# Altium PCB breadboardPlugin.PcbDoc
Units mil, origin at the board's own origin, x right, y up, seen from the top; angles counter-clockwise.
Board outline 2047.24 x 984.25 mil, 2 copper layers (Top Layer, Bottom Layer); 58 components, 28 nets, 160 pads, 69 vias.
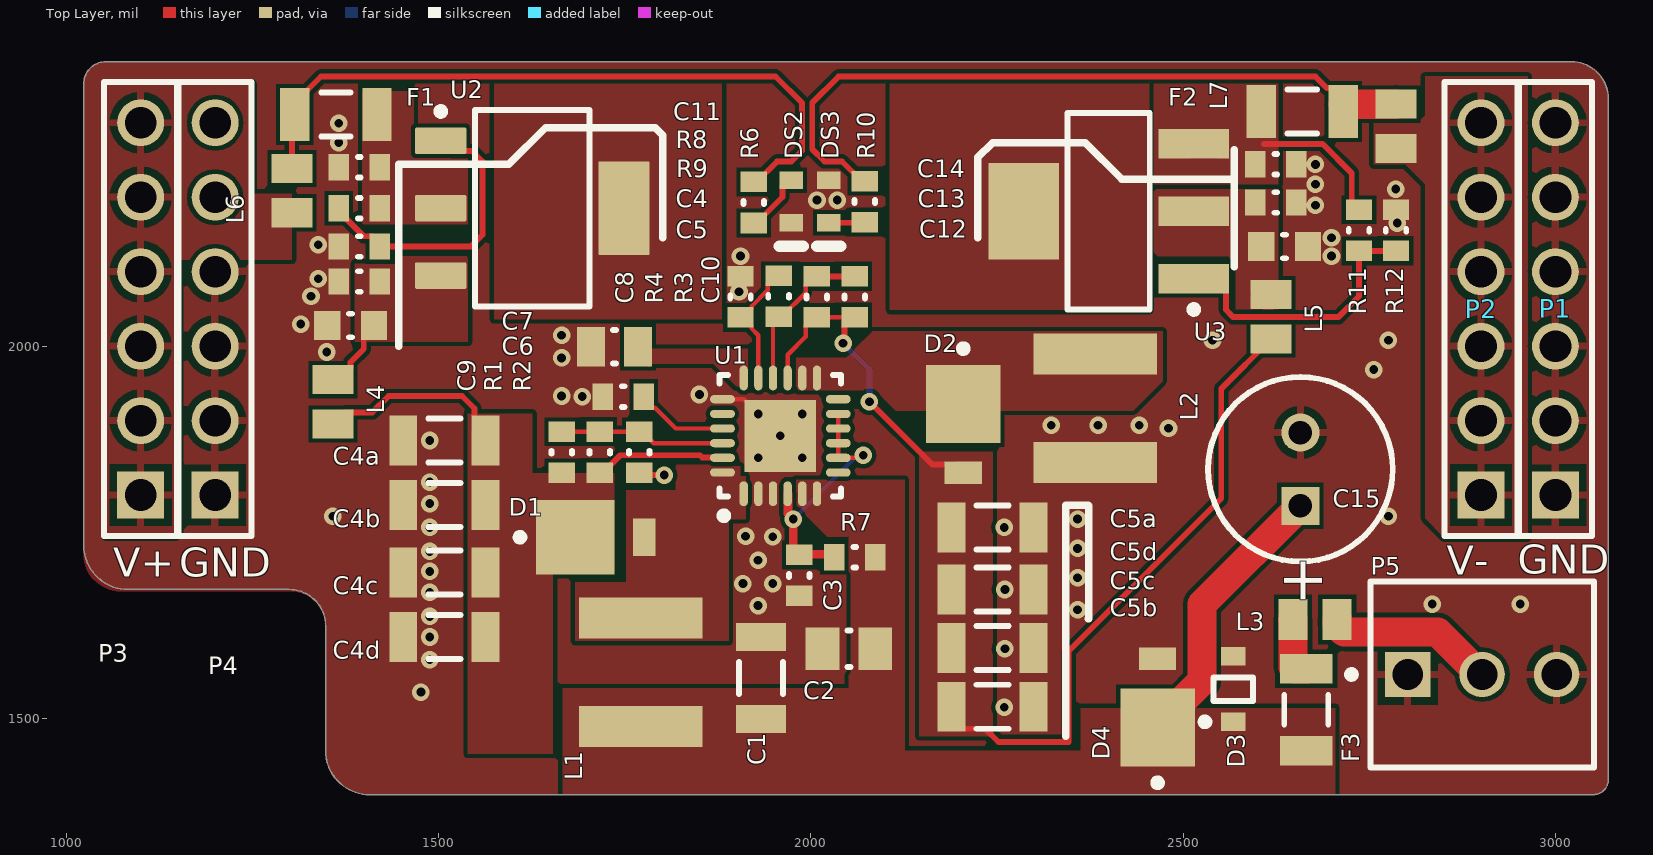
[diagram p0: Top Layer view]
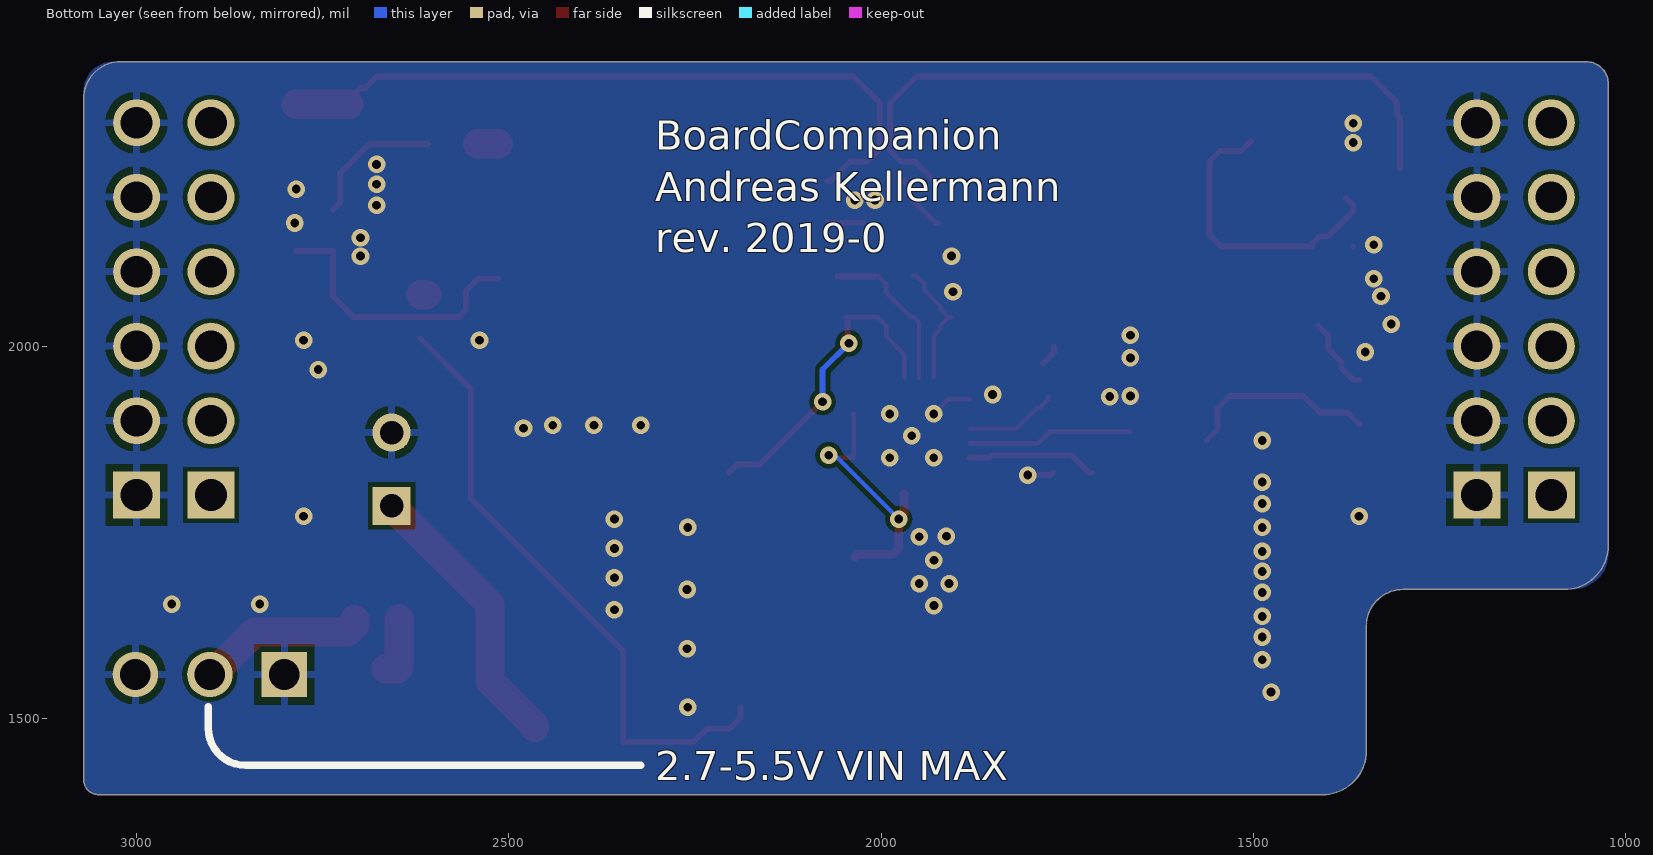
[diagram p1: Bottom Layer view, seen from below]

## Layer stack, top to bottom
Top Solder: solder mask 0.4, Solder Resist, Dk 3.5
Top Layer: signal copper 1.4
Dielectric 1: dielectric 12.6, FR-4, Dk 4.8
Bottom Layer: signal copper 1.4
Bottom Solder: solder mask 0.4, Solder Resist, Dk 3.5

## Board outline
1023.62,1732.28 ccw(c1082.68,1732.28) 1082.68,1673.23 1299.21,1673.23 cw(c1299.21,1624.02) 1348.43,1624.02 1348.43,1456.69 ccw(c1407.48,1456.69) 1407.48,1397.64 3051.18,1397.64 ccw(c3051.18,1417.32) 3070.87,1417.32 3070.87,2332.68 ccw(c3021.65,2332.68) 3021.65,2381.89 1053.15,2381.89 ccw(c1053.15,2352.36) 1023.62,2352.36

## Design rules (kind name [scope] priority, off if disabled: settings)
Clearance [All] p1: gap=5.91 ignorepadtopadclearanceinfootprint=FALSE
PolygonConnect [All] p1: thpad.connectstyle=Relief thpad.reliefconductorwidth=10 thpad.reliefentries=4 thpad.polygonreliefangle="90 Angle" thpad.airgapwidth=10 smdpad.connectstyle=Direct smdpad.reliefconductorwidth=10 smdpad.reliefentries=4 smdpad.polygonreliefangle="90 Angle" smdpad.airgapwidth=10 via.connectstyle=Direct via.reliefconductorwidth=10 via.reliefentries=4 via.polygonreliefangle="90 Angle" via.airgapwidth=10
RoutingVias [All] p1: holewidth=28 width=50 viastyle="Through Hole" minholewidth=11.81 minwidth=23.62 maxholewidth=28 maxwidth=50
SolderMaskExpansion [All] p1: expansion=4
Width [All] p1: maxlimit=196.85 minlimit=5.91 preferedwidth=11.81
30 further rules are at their usual default settings.

## Components (designator, comment, footprint, x,y, rotation, side; value= is the part's Value field where it differs from the comment)
C1 "4.7uF" CAPC1206(3216)190_L 1933.07,1554.33 r270 top
C2 "4.7uF 0805" CAPC0805(2012)155_N 2051.18,1593.7 r0 top value=4.7uF
C3 "100nF" CAPC0603(1608)100_L 1984.25,1692.13 r90 top
C4 "1uF" CAPC0603(1608)100_L 1393.7,2086.81 r0 top value=100nF
C4a "4.7uF" CAPC1206(3216)190_L 1507.87,1609.45 r0 top
C4b "4.7uF" CAPC1206(3216)190_L 1507.87,1873.23 r0 top
C4c "4.7uF" CAPC1206(3216)190_L 1507.87,1786.61 r0 top
C4d "4.7uF" CAPC1206(3216)190_L 1507.87,1696.06 r0 top
C5 "100nF" CAPC0603(1608)100_N 1381.89,2027.76 r0 top
C5a "4.7uF" CAPC1206(3216)190_L 2244.09,1756.52 r180 top
C5b "4.7uF" CAPC1206(3216)190_L 2244.09,1673.23 r180 top
C5c "4.7uF" CAPC1206(3216)190_L 2244.09,1594.49 r180 top
C5d "4.7uF" CAPC1206(3216)190_L 2244.09,1515.75 r180 top
C6 "10nF" CAPC0603(1608)100_L 1748.03,1932.28 r0 top value=100nF
C7 "4.7nF C0G" CAPC0805(2012)75_L 1736.22,1999.21 r0 top value=4.7nF
C8 "220nF" CAPC0603(1608)100_L 1905.51,2066.14 r270 top
C9 "220nF" CAPC0603(1608)100_L 1665.35,1857.48 r270 top
C10 "220nF" CAPC0603(1608)100_L 2059.06,2066.14 r270 top
C11 "1uF" CAPC0603(1608)100_L 1393.7,2240.35 r0 top value=100nF
C12 "100nF" CAPC0603(1608)100_N 2636.22,2133.86 r180 top
C13 "1uF" CAPC0603(1608)100_L 2624.41,2192.91 r180 top value=100nF
C14 "1uF" CAPC0603(1608)100_L 2624.41,2244.09 r180 top value=100nF
C15 "ECA-1HM470" PNSC-ECA-1HM470 2657.48,1834.65 r90 top
D1 "MBRM120LT3" ONSC-POWERMITE-2-457-04_D_V 1736.22,1743.31 r0 top
D2 "MBRM120LT3" ONSC-POWERMITE-2-457-04_D_V 2204.72,1869.85 r270 top
D3 "Q2" ONSC-SOD-323-2-477-02_V 2567.32,1539.37 r90 top
D4 "MBRM120LT3" ONSC-POWERMITE-2-457-04_D_V 2465.69,1540.35 r90 top
DS2 "TLMS1100-GS08" VISH-TLMX1100_V 1973.78,2194.17 r270 top
DS3 "TLMS1100-GS08" VISH-TLMX1100_V 2024.02,2194.17 r270 top
F1 "ptc" LFUS-1206L012WR_V 1362.2,2311.22 r180 top
F2 "ptc" LFUS-1206L012WR_V 2659.84,2314.96 r0 top
F3 "ptc" LFUS-1206L012WR_V 2665.35,1511.81 r270 top
L1 "74404054047" "WE-LQS 5040" 1771.65,1562.2 r90 top
L2 "74404054047" "WE-LQS 5040" 2381.89,1916.54 r90 top
L3 "FBMJ2125HM210NT" INDC2013X105X50LL20T30 2677.17,1632.87 r180 top
L4 "FBMJ2125HM210NT" INDC2013X105X50LL20T30 1358.27,1925.2 r270 top
L5 "FBMJ2125HM210NT" INDC2013X105X50LL20T30 2618.11,2039.37 r270 top
L6 "FBMJ2125HM210NT" INDC2013X105X50LL20T30 1303.15,2208.86 r90 top
L7 "FBMJ2125HM210NT" INDC2013X105X50LL20T30 2785.83,2295.28 r90 top
P1 "PHT-106-01-L-S" SMTC-PHT-106-01-X-S 3000,1800 r90 top
P2 "PHT-106-01-L-S" SMTC-PHT-106-01-X-S 2900,1800 r90 top
P3 "PHT-106-01-L-S" SMTC-PHT-106-01-X-S 1100,1800 r90 top
P4 "PHT-106-01-L-S" SMTC-PHT-106-01-X-S 1200,1800 r90 top
P5 "22-23-2031" MOLX-22-23-2031_V 2901.57,1559.06 r0 top
R1 "tbd" RESC0603(1608)_L 1716.54,1857.48 r90 top value="100.00 Ohm"
R2 "tbd" RESC0603(1608)_L 1769.69,1857.48 r270 top value="100.00 Ohm"
R3 "tbd" RESC0603(1608)_L 2007.87,2066.14 r270 top value="100.00 Ohm"
R4 "tbd" RESC0603(1608)_L 1956.69,2066.93 r270 top value="100.00 Ohm"
R6 "330" RESC0603(1608)_L 1923.23,2192.91 r270 top value="100.00 Ohm"
R7 "100R" RESC0603(1608)_L 2059.06,1716.54 r0 top value="100.00 Ohm"
R8 "tbd" RESC0603(1608)_L 1393.7,2185.24 r180 top value="100.00 Ohm"
R9 "tbd" RESC0603(1608)_L 1393.7,2133.86 r180 top value="100.00 Ohm"
R10 "330" RESC0603(1608)_L 2072.22,2194.17 r270 top value="100.00 Ohm"
R11 "tbd" RESC0603(1608)_L 2736.22,2155.51 r270 top value="100.00 Ohm"
R12 "tbd" RESC0603(1608)_L 2785.83,2155.51 r90 top value="100.00 Ohm"
U1 "TPS65130RGET" TI-RGE24-2450X2450TP_V 1959.06,1879.53 r90 top locked
U2 "LM317AEMP" DCY0004A_N 1625.98,2185.24 r0 top
U3 "LM337IMPX" MP04A_N 2400,2181.1 r180 top

## Footprints (in the part's own frame and the unit in brackets; to place one, negate y for a bottom-side part, rotate by r counter-clockwise, add the part's x,y. Pads: shape width x height; smd on the part's side, far side on the other; paste and mask are expansions set on the pad)
CAPC0603(1608)100_L [mm] "Chip Capacitor, Body 1.6x0.8mm, Height 1.0mm, IPC High Density"
  rect 0.7x0.9 smd: 1(-0.7,0) 2(0.7,0)
  silkscreen extent -0.05,-0.35 0.05,0.35, body extent -0.87,-0.47 0.88,0.48, height 1
CAPC0603(1608)100_N [mm] "Chip Capacitor, Body 1.6x0.8mm, Height 1.0mm, IPC Medium Density"
  rect 0.9x1 smd: 1(-0.8,0) 2(0.8,0)
  silkscreen extent -0.05,-0.4 0.05,0.4, body extent -0.87,-0.48 0.88,0.47, height 1
CAPC0805(2012)75_L [mm] "Chip Capacitor, Body 2.0x1.2mm, Height 0.75mm, IPC High Density"
  rect 0.95x1.35 smd: 1(-0.8,0) 2(0.8,0)
  silkscreen extent -0.05,-0.58 0.05,0.58, body extent -1.1,-0.72 1.1,0.72, height 0.75
CAPC0805(2012)155_N [mm] "Chip Capacitor, Body 2.0x1.2mm, Height 1.55mm, IPC Medium Density"
  rect 1.15x1.45 smd: 1(-0.9,0) 2(0.9,0)
  silkscreen extent -0.05,-0.62 0.05,0.63, body extent -1.1,-0.72 1.1,0.73, height 1.55
CAPC1206(3216)190_L [mm] "Chip Capacitor, Body 3.2x1.6mm, Height 1.9mm, IPC High Density"
  rect 0.95x1.7 smd: 1(-1.4,0) 2(1.4,0)
  silkscreen extent -0.55,-0.75 0.55,0.75, body extent -1.7,-0.9 1.7,0.9, height 1.9
DCY0004A_N [mm] "SOT223, 4-Leads, Body 6.7x3.7mm, Pitch 2.3mm, IPC Medium Density"
  rrect11% 1.75x0.9 smd: 1(-3.125,2.3) 2(-3.125,0) 3(-3.125,-2.3)
  rrect6% 1.75x3.2 smd: 4(3.125,0)
  silkscreen extent -3.25,-3.35 1.95,3.42, body extent -3.5,-3.25 3.5,3.25, height 1.62
INDC2013X105X50LL20T30 [mm] "Chip Inductor, 2-Leads, Body 2.2x1.45mm, IPC High Density"
  rect 0.99x1.39 smd: 1(-0.755,0) 2(0.755,0)
  body extent -1.1,-0.72 1.1,0.72, height 1.05
LFUS-1206L012WR_V [mm] "SMD, 2-Leads, Body 3.2x1.65mm"
  rect 1x1.8 smd: 1(-1.4,0) 2(1.4,0)
  silkscreen extent -0.5,-0.75 0.5,0.75, body extent -1.6,-0.82 1.6,0.82, height 1.45
MOLX-22-23-2031_V [mm] "CONN, 3-Leads, Body 7.62x6.35mm, Pitch 2.54mm"
  rect 1.55x1.55 hole 1.05: 1(-2.54,0)
  round 1.55 hole 1.05: 2(0,0) 3(2.54,0)
  silkscreen extent -4.58,-3.17 3.81,3.17, body extent -3.73,-3.25 3.73,3.1, height 10.67
MP04A_N [mm] "SOT223, 4-Leads, Body 6.5x3.5mm, Pitch 2.3mm, Lead Span 7mm, IPC Medium Density"
  rect 2.4x1 smd: 1(-2.9,2.3) 2(-2.9,0) 3(-2.9,-2.3)
  rect 2.4x3.3 smd: 4(2.9,0)
  silkscreen extent -3.03,-3.35 1.4,3.47, body extent -1.86,-3.35 1.86,3.35, height 1.8
ONSC-POWERMITE-2-457-04_D_V [mil] "POWERMITE, 2-Leads, Body 1.965x1.9mm"
  rect 105.12x100 smd: 1(-52.56,0)
  rect 30x50 smd: 2(40,0)
  silkscreen extent -132,-5 -122,5, body extent -80,-37 -3,37, height 45
ONSC-SOD-323-2-477-02_V [mm] "SOD, 2-Leads, Body 1.7x1.25mm"
  rect 0.63x0.83 smd: 1(-1.115,0) 2(1.115,0)
  silkscreen extent -1.24,-0.67 0.4,1.09, body extent -0.85,-0.63 0.85,0.63, height 1.06
PNSC-ECA-1HM470 [mm]
  rect 1.3x1.3 hole 0.8: 1(-1.25,0)
  round 1.3 hole 0.8: 2(1.25,0)
  silkscreen extent -3.15,-3.15 3.15,3.15, body extent -3.15,-3.15 3.15,3.15, height 12.2
RESC0603(1608)_L [mm] "Chip Resistor, Body 1.6x0.8mm, IPC High Density"
  rect 0.7x0.9 smd: 1(-0.7,0) 2(0.7,0)
  silkscreen extent -0.05,-0.35 0.05,0.35, body extent -0.85,-0.47 0.85,0.47, height 0.6
SMTC-PHT-106-01-X-S [mm] "Press Fit Socket Assembly, 1x6 Pins, Vertical, 2.54mm Pitch, Male"
  rect 1.6x1.6 hole 1.081: 1(0,0)
  round 1.6 hole 1.081: 2(2.54,0) 3(5.08,0) 4(7.62,0) 5(10.16,0) 6(12.7,0)
  silkscreen extent -1.4,-1.24 14.1,1.24, body extent -1.26,-1.25 13.96,1.25, height 8.38
TI-RGE24-2450X2450TP_V [mm] "QFN, 24-Leads, Body 4x4mm, Pitch 0.5mm, Thermal Pad 2.45x2.45mm"
  oval 0.85x0.28 smd: 1(-1.975,1.25) 2(-1.975,0.75) 3(-1.975,0.25) 4(-1.975,-0.25) 5(-1.975,-0.75) 6(-1.975,-1.25) 13(1.975,-1.25) 14(1.975,-0.75) 15(1.975,-0.25) 16(1.975,0.25) 17(1.975,0.75) 18(1.975,1.25)
  oval 0.28x0.85 smd: 7(-1.25,-1.975) 8(-0.75,-1.975) 9(-0.25,-1.975) 10(0.25,-1.975) 11(0.75,-1.975) 12(1.25,-1.975) 19(1.25,1.975) 20(0.75,1.975) 21(0.25,1.975) 22(-0.25,1.975) 23(-0.75,1.975) 24(-1.25,1.975)
  rect 2.45x2.45 smd: 25(0,0)
  silkscreen extent -2.85,-2.07 2.07,2.07, body extent -2,-2 2,2, height 1
VISH-TLMX1100_V [mm] "SMD, 2-Leads, Body 1.6x0.8mm"
  rect 0.6x0.8 smd: 1(-0.725,0) 2(0.725,0)
  silkscreen extent 1.53,-0.4 1.53,0.4, body extent -0.8,-0.4 0.8,0.4, height 0.65
"WE-LQS 5040" [mm] "SMD Power Inductor, 2-Leads, Body 5.0x5.0mm"
  rect 1.4x4.2 smd: 1(-1.85,0) 2(1.85,0)
  body extent -2.5,-2.5 2.5,2.5, height 3.99

## Part data
C1 C4a C4b C4c C4d C5a C5b C5c C5d: library part CMP-1037-04919-1, "CAP 4.7uF 25V ±20% 1206 (3216 Metric) Thickness 1.9mm SMD", Case-EIA=1206, Case-Metric=3216, Rated Voltage="25 V", Tolerance=±20%, Max Thickness="1.9 mm", Technology=SMT
C2: library part CMP-1036-04882-1, "CAP 4.7uF 10V ±10% 0805 (2012 Metric) Thickness 1.55mm SMD", Case-EIA=0805, Case-Metric=2012, Rated Voltage="10 V", Tolerance=±10%, Max Thickness="1.55 mm", Technology=SMT
C3 C5 C6 C12: library part CMP-1035-02589-1, "CAP 100nF 25V ±20% 0603 (1608 Metric) Thickness 1mm SMD", Case-EIA=0603, Case-Metric=1608, Rated Voltage="25 V", Tolerance=±20%, Max Thickness="1 mm", Technology=SMT
C4 C11 C13 C14: library part CMP-1035-02589-1, "CAP 1uF 25V ±20% 0603 (1608 Metric) Thickness 1mm SMD", Case-EIA=0603, Case-Metric=1608, Rated Voltage="25 V", Tolerance=±20%, Max Thickness="1 mm", Technology=SMT
C7: library part CMP-1036-03595-1, "CAP 4.7nF 50V ±20% 0805 (2012 Metric) Thickness 0.75mm SMD", Case-EIA=0805, Case-Metric=2012, Rated Voltage="50 V", Tolerance=±20%, Max Thickness="0.75 mm", Technology=SMT
C8 C9 C10: library part CMP-1035-02639-1, "CAP 220nF 10V ±5% 0603 (1608 Metric) Thickness 1mm SMD", Case-EIA=0603, Case-Metric=1608, Rated Voltage="10 V", Tolerance=±5%, Max Thickness="1 mm", Technology=SMT
C15: library part CMP-1665-00013-1, "CAP ALUM 47UF 50V 20% RADIAL", ComponentLink1Description=Datasheet, ComponentLink1URL=http://industrial.panasonic.com/cdbs/www-data/pdf/RDF0000/ABA0000C1047.pdf, PackageReference=ECA-1HM470, PartNumber=ECA-1HM470
D1 D2 D4: library part CMP-1055-00282-1, "Schottky Power Rectifier, 2-Pin Powermite, Tape and Reel", Manufacturer="On Semiconductor", ComponentLink1Description="Manufacturer URL", ComponentLink1URL=http://www.onsemi.com/, ComponentLink2Description=Datasheet, ComponentLink2URL=http://www.onsemi.cn/pub_link/Collateral/MBRM120L-D.PDF, ComponentLink3Description="Package Specification", ComponentLink3URL=http://www.onsemi.com/pub_link/Collateral/457-04.PDF, Configuration=Single, DatasheetVersion="Rev. 7", IFSM Max (A)=50, Mounting Technology="Surface Mount", Note1=0, PackageDescription="2-Pin POWERMITE, Body 1.965 x 1.9 mm", PackageReference=POWERMITE-2-457-04, PackageVersion="Rev. F, 05/2013", Packing="Tape and Reel", PartNumber=MBRM120LT3, RoHS=FALSE
D3: library part CMP-1060-00706-1, "MM3Z5V6ST1G, Zener Voltage Regulator, 300 mW, Tight Tolerance Portfolio, 2-Pin SOD-323, Pb-Free, Tape and Reel, MM3Z5V6ST1G", Manufacturer="On Semiconductor", PartNumber=MM3Z5V6ST1G, ComponentLink1Description="Manufacturer URL", ComponentLink1URL=http://www.onsemi.com/, ComponentLink2Description=Datasheet, ComponentLink2URL=http://www.onsemi.cn/pub_link/Collateral/MM3Z2V4ST1-D.PDF, ComponentLink3Description="Package Specification", ComponentLink3URL=http://www.onsemi.com/pub_link/Collateral/477-02.PDF.1, DatasheetVersion="Rev. 21", Mounting Technology="Surface Mount", PackageDescription="2-Pin SOD, Body 1.7 x 1.25 mm", PackageReference=SOD-323-2-477-02, PackageVersion="Rev. H, 03/2007", Packing="Tape and Reel", P Max (W)=0.3, RoHS=Pb-Free
DS2 DS3: library part CMP-1666-00027-1, "LED, RED, 2.1 V, -40 to 100 degC, 2-Pin SMD (0603), RoHS, Tape and Reel", Capacitance="12 pF", Case/Package=0603, Case Code (Metric)=1608, Max Operating Temperature=125degC, Min Operating Temperature=-55degC, Package Quantity=4000, Resistance="100000000000 Ohm", Tolerance=5%, Type (Capacitors)=C0G, Voltage Rating="50 V", Case Code (Imperial)=0603, ComponentLink1Description="Manufacturer URL", ComponentLink1URL=http://www.vishay.com/, ComponentLink2Description=Datasheet, ComponentLink2URL=http://www.vishay.com/docs/83173/tlmb1100.pdf, DatasheetVersion="Rev. 2.7, 03/2016", Height="0.8 mm", Length="1.6 mm", Mount="Surface Mount", PackageDescription="2-Pin Surface Mount Device, Body 1.6 x 0.8 mm", PackageReference=TLMX1100, Packaging="Tape and Reel", Pins=2, Radiation Hardening=No, REACH SVHC="No SVHC", RoHSCompliant=True, Voltage Rating (DC)="50 V", Width="0.8 mm"
F1 F2 F3: library part CMP-2000-05470-1, "200mA PTC", Hold Current [Ih]=0.125A, Manufacturer=Littelfuse, Operating Temp Range=-40to+85°C, Package Description="2-Pin Surface Mount Device, Body 3.2 x 1.65 mm", Package Reference=1206, Trip Current=0.29A, Working Voltage-Max=30V, Datasheet URL=https://datasheet.ciiva.com/26787/1206l012wr-26787215.pdf, Datasheet Version=04/2012, Manufacturer URL=http://www.littelfuse.com/, Mounting Technology=SurfaceMount, Size=1206
L1 L2: library part CMP-1354-00047-1, "WE-LQS SMD Power Inductor, L=4.7 µH", Inductance="4.7 µH", Manufacturer="Wuerth Elektronik", ComponentLink1Description="Manufacturer URL", ComponentLink1URL=http://www.we-online.com, ComponentLink2Description=Datasheet, ComponentLink2URL=http://katalog.we-online.de/pbs/datasheet/74404054047.pdf, PackageReference="WE-LQS 5040", PartNumber=74404054047
L3 L4 L5 L6 L7: library part CMP-1660-00003-1, "Chip Inductor, 21 Ohm, +/- 30%, 6 A, -40 to 125 degC, 0805 (2012 Metric), RoHS, Tape and Reel", Case\Package=0805, Case Code (Metric)=2012, Current Rating="6 A", Max Operating Temperature="125 degC", Min Operating Temperature="-40 degC", Package Quantity=1, Resistance="4 mohm", Tolerance=30%, Case Code (Imperial)=0805, ComponentLink1Description="Manufacturer URL", ComponentLink1URL=http://www.t-yuden.com/, ComponentLink2Description=Datasheet, ComponentLink2URL=http://ds.yuden.co.jp/TYCOMPAS/ut/detail.do?productNo=FBMJ2125HM210NT&fileName=FBMJ2125HM210NT_SS&mode=specSheetDownload, Core Material=Ferrite, DatasheetVersion=08/2016, Height="0.85 mm", Impedance="21 Ohm", Length="2 mm", Max Current Rating="6 A", Mount="Surface Mount", Mounting Technology="Surface Mount", PackageDescription="2-Pin Surface Mount Device, Body 2 x 1.25 mm", PackageReference=0805, Packaging="Tape and Reel", REACH SVHC=Unknown, RoHSCompliant=true, Width="1.25 mm"
P1 P2 P3 P4: library part CMP-1024-00187-1, "Press Fit Header, Through-hole, Vertical, -55 to 125 degC, 2.54 mm Pitch, 6-Pin, Male, RoHS", Manufacturer=Samtec, Temperature Range="-55 to 125 degC", ComponentLink1Description="Manufacturer URL", ComponentLink1URL=http://www.samtec.com, ComponentLink2Description=Datasheet, ComponentLink2URL=http://www.samtec.com/documents/webfiles/pdf/pht.pdf, ComponentLink3Description="Package Specification", ComponentLink3URL=http://www.samtec.com/documents/webfiles/cpdf/PHT-1XX-XX-X-X-XXX-MKT.pdf, DatasheetVersion=F-214, Mounting Technology=Through-hole, Orientation=Vertical, PackageDescription=".100 Press Fit Socket Assembly", PackageReference=PHT-106-01-X-S, PackageVersion="J, 9/2009", PartNumber=PHT-106-01-L-S, Pitch="2.54 mm", RoHS=True
P5: library part CMP-2000-05242-1, "Male Header, Pitch 2.54 mm, 1 x 3 Position, Height 8.18 mm, Tail Length 3.56 mm, RoHS, Bulk", Current Rating=4A, Manufacturer=Molex, Voltage Rating=250V, =0022232031A-6373-03A102, Brand=Molex, Contact Gender=Pin(Male), Contact material=Brass, Contact Plating=Tin, Datasheet URL=https://datasheet.ciiva.com/19472/232274-19472863.pdf, Datasheet Version=Sep-01, Factory Pack Quantity=16000, Housing material=Nylon, Manufacturer URL=http://www.molex.com/, Mounting Angle=Vertical, Mounting Style=ThroughHole, Number of Positions=3Position, Number of Rows=1Row, Packaging=Bulk, Pitch=2.54mm, Product=Headers, Product Category=Headers&WireHousings, RoHS=Details, Series=6373, Termination Style=ThroughHole, Tradename=KK, Type=Locking
R1 R2 R3 R4 R6 R7 R8 R9 R10 R11 R12: library part CMP-1012-00397-1, "100R 0.1W 1% 0603 (1608 Metric)  SMD", Case-EIA=0603, Case-Metric=1608, Power="0.1 W", Tolerance="1 %", Technology=SMT
U1: library part CMP-0388-00544-1, "Postive and Negative Output DC-DC Converter, 2.7 to 5.5 V, -40 to 85 degC, 24-pin QFN (RGE24), Green (RoHS & no Sb/Br)", Manufacturer="Texas Instruments", Rating=Catalog, Switching Frequency(Typ)(kHz)=1400, Code_JEDEC=MO-220, ComponentLink1Description="Manufacturer URL", ComponentLink1URL=http://www.ti.com/, ComponentLink2Description=Datasheet, ComponentLink2URL=http://www.ti.com/general/docs/lit/getliterature.tsp?genericPartNumber=TPS65130&fileType=pdf, ComponentLink3Description="Package Specification", ComponentLink3URL=http://www.ti.com/litv/pdf/mpqf124f, DatasheetVersion=SLVS493B, Eco-Plan="Green (RoHS & no Sb/Br)", Iq(Typ)(mA)=0.5, Mounting Technology="Surface Mount", PackageDescription="24-Pin Plastic Flat Pack, Body 4 x 4 mm, 0.5 mm Pitch", PackageReference=RGE24-2450X2450TP, PackageVersion=4204104/G, PartNumber=TPS65130RGET, SubFamily="LCD/OLED Display Bias Solutions", Topology="Boost, Inverting Buck/Boost", Vin(Max)(V)=5.5, Vin(Min)(V)=2.7
U2: library part CMP-0062-01709-3, "3-Terminal Adjustable Regulator, 4-pin SOT-223", Manufacturer="Texas Instruments", PackageTopMarking=XYTT*N07A, PowerWise=N, Code_IPC=SOT223-4, Code_JEDEC=TO-261-AA, ComponentLink1Description="Datasheet URL", ComponentLink1URL=http://www.ti.com/general/docs/lit/getliterature.tsp?genericPartNumber=LM317-N&fileType=pdf, CompType="LDO IC", PackageDescription="Molded SOT-223, 6.50 x 3.56 x 1.6mm Body, 4 Lead, 2.3mm Pitch", PackageReference=DCY0004A, PinCount=4, RoHS=N
U3: library part CMP-0062-01833-1, "3-Terminal Adjustable Negative Regulator, 4-pin SOT-223", Manufacturer="National Semiconductor", PackageTopMarking=XYTT*N02A, PowerWise=N, Code_IPC=SOT223-4, Code_JEDEC=TO-261-AA, CompType="LDO IC", DatasheetVersion=Nov-2004, PackageDescription="Molded SOT-223, 6.50 x 3.56 x 1.6mm Body, 4 Lead, 2.3mm Pitch", PackageReference=MP04A, PackageVersion="revB, Apr-2003", PinCount=4, RoHS=N

## Via types
v1: diameter 23.62, hole 11.81, Top Layer to Bottom Layer, tented both sides, 69 vias

## Nets (pads, with @x,y where several pads share a name; then routed paths per layer and width w, separated by ;. In a path a pad name is that pad's centre, name@x,y a point inside that pad or via, vN(x,y) a via of type N, cw(c..) or ccw(c..) an arc to the next point about the centre after c; other vN are vias at no path point)
+12V: C4a.2 C4b.2 C4c.2 C4d.2 C9.2 D1.1 L4.2 R1.1 U1.23 | length 437.7
  Top Layer w7.87: L4.2 1373.82,1911.02 1411.02,1911.02 1433.07,1933.07 1531.5,1933.07 1548.23,1916.34 1548.23,1887.99 C4b.2 ; R1.1 1720.47,1829.92 1744.09,1853.54 1851.18,1853.54 1854.12,1850.6 1880.7,1850.6 U1.23
-12V: C5a.2 C5b.2 C5c.2 C5d.2 C10.2 D2.2 L5.2 R3.2 U1.15 | length 1273.7
  Top Layer w5.91: U1.15 1968.9,1988.58 1993.11,2012.8 1993.11,2027.76 2003.94,2038.58 R3.2 C10.2@2047.24,2038.58
  Top Layer w7.87: v1(2043.31,2003.94) 2045.28,2005.91 2045.28,2036.61 C10.2@2047.24,2038.58 ; v1(2078.74,1925.2) 2163.03,1840.91 2193.66,1840.91 D2.2 ; C5d.2 2188.98,1500.98 2203.74,1486.22 2234.25,1486.22 2251.97,1468.5 2346.46,1468.5 2346.46,1590.55 2551.18,1795.28 2551.18,1942.72 L5.2
  Bottom Layer w7.87: v1(2043.31,2003.94) 2078.74,1968.5 v1(2078.74,1925.2)
CT1: U2.4
CT2: U3.4
GND: C1.1 C2.1 C3.1 C4.1 C4a.1 C4b.1 C4c.1 C4d.1 C5.1 C5a.1 C5b.1 C5c.1 C5d.1 C6.1 C7.1 C8.1 C11.1 C12.1 C13.1 C14.1 C15.2 D3.2 D4.2 DS2.2 DS3.1 L2.1 P1.1 P1.2 P1.3 P1.4 P1.5 P1.6 P4.1 P4.2 P4.3 P4.4 P4.5 P4.6 P5.1 P5.3 R2.2 R9.2 R12.2 U1.2 U1.3 U1.19 U1.25 | length 91.2
  Top Layer w5.91: U1.19 1909.84,1928.74 v1(1929.53,1909.06)
  Top Layer w7.87: R2.2 1772.83,1826.77 v1(1803.15,1826.77)
  other v1: 2259.84,1515.18 1476.38,1535.43 1488.19,1578.74 2260.63,1593.7 1488.19,1609.45 1488.19,1637.01 2358.27,1645.87 1929.13,1651.57 2834.64,1653.54 2952.76,1653.54 1488.19,1669.29 2260.63,1673.23 1908.81,1681.1 1948.82,1681.1 2358.27,1688.98 1488.19,1697.43 1929.13,1712.6 1488.19,1724.41 2358.27,1728.35 1948.82,1744.09 1912.45,1744.68 1488.19,1756.52 2259.84,1756.52 2358.27,1767.72 1358.27,1771.65 2775.59,1771.65 1488.19,1788.59 1488.19,1817.45 1929.53,1850 1988.58,1850 1488.19,1873.23 1959.06,1879.53 2480.31,1889.76 2322.83,1893.7 2385.83,1893.7 2440.94,1893.7 1988.58,1909.06 1692.91,1932.28 1665.35,1933.07 1850.39,1935.04 2755.91,1968.5 1665.35,1984.25 1349.91,1992.13 2539.37,2007.87 2775.59,2007.87 1665.35,2014.57 1314.96,2029.6 1328.74,2066.93 1903.54,2073.03 1338.58,2090.55 1905.51,2120.93 2699.21,2120.93 1338.58,2136.25 2699.21,2145.67 2787.4,2165.35 2677.56,2189.17 2008.27,2196.14 2035.43,2196.14 2785.43,2210.9 2677.56,2217.38 2677.56,2244.09 1366.14,2273.32 1366.14,2299.21
NetC3_2: C3.2 R7.1 U1.4 U1.8 U1.9 U1.10 U1.11 | length 364.2
  Top Layer w5.91: 1976.38,1755.91 v1(1976.38,1767.72) ; U1.11 U1.10 U1.9 U1.8 2066.88,1850 v1(2070.42,1853.54)
  Top Layer w11.81: U1.4 1969.29,1801.38 1969.29,1774.8 v1(1976.38,1767.72) ; 1976.38,1755.91 1976.38,1728.35 1984.25,1720.47 2031.5,1720.47 R7.1@2035.43,1716.54
  Bottom Layer w5.91: v1(1976.38,1767.72) 2058.66,1850 2066.96,1850 v1(2070.42,1853.54) v1(2070.42,1853.54)
NetC4_2: C4.2 C5.2 L4.1 U2.3 | length 100.3
  Top Layer w7.87: L4.1 1366.14,1954.92 1381.69,1970.47 1381.69,1978.35 1399.61,1996.26 1399.61,2013.98 C5.2
NetC6_2: C6.2 U1.21 | length 125.8
  Top Layer w5.91: C6.2 1775.59,1928.35 1786.42,1917.52 1790.35,1917.52 1818.5,1889.37 U1.21
NetC7_2: C7.2 U1.18 | length 28.8
  Top Layer w7.87: C7.2 1767.72,1991.34 C7.2@1782.48,1976.57
NetC8_2: C8.2 R4.1 U1.17 | length 171.3
  Top Layer w5.91: C8.2 C8.2@1909.45,2038.58 ; U1.17 1929.53,2014.57 1920.28,2023.82 1920.28,2027.76 C8.2@1909.45,2038.58 ; R4.1 1952.76,2094.49 1941.93,2083.66 1941.93,2075 1920.28,2053.35 1920.28,2049.41 C8.2@1909.45,2038.58
NetC9_1: C9.1 R1.2 R2.1 U1.22 | length 222.3
  Top Layer w5.91: C9.1 R1.2 1773.62,1885.04 1788.98,1869.69 U1.22
NetC10_1: C10.1 R3.1 R4.2 U1.16 | length 216.5
  Top Layer w5.91: U1.16 1949.21,2031.89 R4.2 1960.63,2039.37 1993.11,2071.85 1993.11,2082.87 2003.94,2093.7 R3.1
  Top Layer w7.87: R3.1 C10.1
NetC11_2: C11.2 F1.1 R8.1 U2.2
NetC12_2: C12.2 C13.2 L5.1 U3.2 | length 7.8
  Top Layer w39.37: L5.1@2610.43,2069.29 2610.63,2069.09 L5.1
NetC14_2: C14.2 F2.1 R11.1 U3.3 | length 214.9
  Top Layer w7.87: 2608.66,2271.65 2687.01,2271.65 2726.38,2232.28 2726.38,2192.91 R11.1
  Top Layer w39.37: U3.3 U3.3@2541.73,2271.65
NetD1_2: D1.2 L1.2 U1.1 U1.24
NetD2_1: D2.1 L2.2 U1.13 U1.14
NetDS2_1: DS2.1 R6.2 | length 82.9
  Top Layer w7.87: R6.2 1927.17,2165.35 1961.96,2200.15 1961.96,2214.84 1969.84,2222.72 DS2.1
NetDS3_2: DS3.2 R10.2 | length 48.6
  Top Layer w7.87: DS3.2 2071.24,2165.63 R10.2
NetF1_2: F1.2 L6.2 R6.1 | length 947.5
  Top Layer w7.87: L6.2 1303.15,2307.28 F1.2 1307.09,2326.97 1342.32,2362.2 1952.66,2362.2 1988.19,2326.68 1988.19,2262.45 1973.78,2248.03 1954.72,2248.03 1927.17,2220.47 R6.1 R6.1@1922.9,2220.15
NetF2_2: F2.2 L7.2 R10.1 | length 967.8
  Top Layer w7.87: R10.1 2068.28,2221.73 2041.99,2248.03 2018.39,2248.03 2001.97,2264.45 2001.97,2326.76 2037.41,2362.2 2677.56,2362.2 2693.31,2346.46 2699.21,2346.46 2714.96,2330.71 F2.2@2714.96,2324.8
  Top Layer w39.37: F2.2@2714.96,2324.8 2785.63,2324.8 L7.2
NetF3_1: F3.1 L3.2 | length 83.1
  Top Layer w39.37: L3.2@2647.24,1633.27 2647.44,1633.07 L3.2 2647.64,1632.68 2647.64,1568.9 2649.61,1566.93 F3.1
NetL3_1: L3.1 P5.2 | length 235.5
  Top Layer w39.37: L3.1 2706.89,1625.39 2716.14,1616.14 2841.7,1616.14 2898.79,1559.06 P5.2 P5.2@2897.43,1554.91
NetR8_2: R8.2 R9.1 U2.1 | length 409.2
  Top Layer w7.87: R8.2@1375.98,2199.02 1366.14,2189.17 R8.2 1366.14,2181.3 1399.8,2147.64 1411.42,2147.64 1421.26,2137.8 R9.1 1543.31,2133.86 1559.06,2149.61 1559.06,2248.03 1545.08,2262.01 1516.73,2262.01 U2.1
NetR11_2: R11.2 R12.1 U3.1 | length 380.8
  Top Layer w7.87: U3.1 2541.73,2090.55 2557.48,2074.8 2557.48,2048.82 2567.32,2038.98 2708.27,2038.98 2736.22,2066.93 R11.2 R12.1
NVR: L7.1 P2.1 P2.2 P2.3 P2.4 P2.5 P2.6
PVR: L6.1 P3.1 P3.2 P3.3 P3.4 P3.5 P3.6
VIN: C1.2 C2.2 C15.1 D3.1 D4.1 F3.2 L1.1 R7.2 U1.5 U1.6 | length 377.1
  Top Layer w39.37: D4.1 2465.69,1490.35 2525.39,1550.06 2525.39,1653.35 C15.1
pads on no net: U1.7 U1.12 U1.20

## Polygon pours and split planes (outlines as drawn)
GND on Top Layer "Top Layer-GND" (solid, pour order 70): 1053.15,2381.89 ccw(c1053.15,2352.36) 1023.62,2352.36 1023.62,1720.32 ccw(c1072.83,1720.32) 1072.83,1671.11 1301.33,1671.11 cw(c1301.33,1624.02) 1348.43,1624.02 1348.43,1456.69 ccw(c1407.48,1456.69) 1407.48,1397.64 3051.18,1397.64 ccw(c3051.18,1417.32) 3070.87,1417.32 3070.87,2333.03 ccw(c3022.01,2333.03) 3022.01,2381.89
VIN on Top Layer "Top Layer-NetC2_2" (solid, pour order 10): 1980.32,1820.44 1980.32,1785.94 2022.16,1744.09 2051.18,1744.09 2051.18,1519.68 2500,1519.68 2125.98,1519.68 2125.98,1820.44
-12V on Top Layer (solid, pour order 68): 2145.67,1858.27 2244.09,1858.27 2244.09,1476.38 2145.67,1476.38
VIN on Top Layer (solid, pour order 66): 1666.84,1540.35 1666.84,1397.64 2704.11,1397.64 2704.11,1513.78 2362.2,1513.78 2362.2,1456.69 2125.98,1456.69 2125.98,1540.35
no net on Top Layer "Top Layer-No Net" (solid, pour order 50): 2165.35,1397.64
no net on Top Layer "Top Layer-No Net 1" (solid, pour order 48): 2161.42,1397.64
CT1 on Top Layer "Top Layer-CT1" (solid, pour order 46): 1574.8,2036.25 1880.7,2036.25 1880.7,2352.17 1574.8,2352.17
CT2 on Top Layer "Top Layer-CT2" (solid, pour order 44): 2454.72,2048.82 2106.3,2048.82 2106.3,2352.17 2454.72,2352.17
no net on Top Layer "Top Layer-No Net 2" (solid, pour order 42): 2454.72,2352.17
no net on Top Layer "Top Layer-No Net 3" (solid, pour order 40): 2456.89,2256.96
NetC14_2 on Top Layer "Top Layer-NetC14_2" (solid, pour order 38): 2627.95,2217.38 2460.63,2217.38 2460.63,2352.36 2627.95,2352.36
NetC12_2 on Top Layer "Top Layer-NetC12_2" (solid, pour order 36): 2460.63,2210.9 2460.63,2125.98 2465.69,2120.93 2560.57,2120.93 2570.67,2110.83 2570.67,2049.41 2627.95,2049.41 2627.95,2210.75
NetC7_2 on Top Layer "Top Layer-NetC7_2" (solid, pour order 34): 1914.58,1946.06 1915.09,1946.58 1915.09,1996.26 1761.81,1996.26 1761.81,1976.57 1869.09,1976.57 1899.61,1946.06
NVR on Top Layer "Top Layer-NVR" (solid, pour order 28): 2755.91,2300 2814.96,2300 2824.8,2309.84 2824.8,2362.2 3041.34,2362.2 2962.6,2362.2 2962.6,1743.31 2850.19,1743.31 2824.8,1768.69 2824.8,2217.38 2798.09,2244.09 2755.91,2244.09
NetC11_2 on Top Layer "Top Layer-NetC11_2" (solid, pour order 30): 1397.64,2342.52 1462.4,2342.52 1462.93,2343.05 1466.54,2339.44 1466.54,2253.94 1539.37,2253.94 1539.37,2163.56 1399.43,2163.56 1397.64,2165.35
NetC4_2 on Top Layer "Top Layer-NetC4_2" (solid, pour order 32): 1387.8,2005.91 1387.8,2110.83 1441.54,2110.83 1451.64,2120.93 1543.31,2120.93 1539.37,2116.99 1539.37,2005.91
PVR on Top Layer "Top Layer-PVR" (solid, pour order 26): 1303.15,2204.72 1303.15,2116.14 1151.57,2116.14 1151.57,1747.24 1149.01,1744.68 1053.15,1744.68 1053.15,2352.36 1250,2352.36 1250,2204.72
+12V on Top Layer "Top Layer-+12V" (solid, pour order 24): 1736.22,1829.33 1736.22,1696.06 1653.54,1696.06 1653.54,1452.76 1539.37,1452.76 1539.37,1909.45 1625.98,1909.45 1625.98,1830.25
NetD1_2 on Top Layer "Top Layer-NetD1_2" (solid, pour order 20): 1870.08,1840.55 1818.5,1840.55 1818.5,1806.29 1751.97,1806.29 1751.97,1683.07 1683.66,1683.07 1683.66,1604.33 1889.76,1604.33 1889.76,1767.72 1918.84,1767.72 1918.84,1835.11 1921.26,1837.52
no net on Top Layer "Top Layer-No Net 4" (solid, pour order 16): 2141.73,1759.84
NetD2_1 on Top Layer "Top Layer-NetD2_1" (solid, pour order 12): 1980.32,1940.94 2086.61,1940.94 2114.17,1913.39 2433.07,1913.39 2472.44,1952.76 2472.44,2019.68 2082.68,2019.68 2047.24,1984.25 1980.32,1984.25
GND on Top Layer "Top Layer-GND 1" (solid, pour order 6): 1897.64,1590.55 ccw(c1897.64,1591.68) 1898.77,1591.68 1898.77,1759.84 1918.84,1759.84 1918.84,1889.37 1960.63,1889.37 1960.63,1692.91 2047.24,1692.91 2047.24,1562.99 1898.77,1562.99 1898.77,1561.02
no net on Top Layer "Top Layer-No Net 5" (solid, pour order 4): 1921.26,1837.52
no net on Top Layer "Top Layer-No Net 6" (solid, pour order 2): 1921.26,1854.33
GND on Bottom Layer "Bottom Layer-GND" (solid, pour order 64): 1053.15,2381.89 ccw(c1053.15,2352.36) 1023.62,2352.36 1023.62,1722.44 ccw(c1072.83,1722.44) 1072.83,1673.23 1299.21,1673.23 cw(c1299.21,1624.02) 1348.43,1624.02 1348.43,1456.69 ccw(c1407.48,1456.69) 1407.48,1397.64 3051.18,1397.64 ccw(c3051.18,1417.32) 3070.87,1417.32 3070.87,2342.52 ccw(c3031.5,2342.52) 3031.5,2381.89
GND on Bottom Layer "Bottom Layer-GND 1" (solid, pour order 62): 1653.54,1397.64
GND on Bottom Layer "Bottom Layer-GND 2" (solid, pour order 60): 1496.06,1397.64
GND on Bottom Layer "Bottom Layer-GND 3" (solid, pour order 58): 3169.29,1338.58
GND on Bottom Layer "Bottom Layer-GND 4" (solid, pour order 56): 3149.61,1338.58

## Silkscreen, mask and mechanical layers (free items; w line width, h text height)
Top Overlay:
  lines w10: 1446.85,2000 1446.85,2244.09 1594.49,2244.09 1643.7,2293.31 1791.34,2293.31 1801.18,2283.46 1801.18,2145.67 ; 2224.41,2145.67 2224.41,2253.64 2244.09,2273.32 2368.41,2273.32 2417.32,2224.41 2568.9,2224.41 2568.9,2263.78 2568.9,2106.3 ; 2342.52,1476.38 2342.52,1786.04 2372.62,1786.04 cw(c2372.62,1785.43) 2373.23,1785.43 2373.23,1634.47 cw(c2372.62,1634.47) 2372.62,1633.86
  text "GND" at 2949.02,1694.09 h39.37
  text "V-" at 2854.33,1692.91 h39.37
  text "V+" at 1062.99,1690.16 h39.37
  text "GND" at 1151.57,1690.16 h39.37
Bottom Overlay:
  lines w10: 2322.83,1437.01 2853.54,1437.01 ccw(c2853.54,1487.01) 2903.54,1487.01 2903.54,1515.75
  text "BoardCompanion" at 2303.15,2263.78 h39.37
  text "Andreas Kellermann" at 2303.15,2194.88 h39.37
  text "rev. 2019-0" at 2303.15,2125.98 h39.37
  text "2.7-5.5V VIN MAX" at 2303.15,1417.32 h39.37
Mechanical 2:
  lines w10: 1023.62,1723.23 ccw(c1073.62,1723.23) 1073.62,1673.23 1299.91,1673.23 cw(c1299.91,1623.23) 1349.91,1623.23 1349.91,1447.64 ccw(c1399.91,1447.64) 1399.91,1397.64 3051.18,1397.64 ccw(c3051.18,1417.32) 3070.87,1417.32 3070.87,2342.52 ccw(c3031.5,2342.52) 3031.5,2381.89 1200,2381.89 1043.31,2381.89 ccw(c1043.31,2362.2) 1023.62,2362.2 1023.62,1723.23

## Text inside footprints (layer, text, board x,y; h text height)
C15: Top Overlay "+" at 2687.01,1651.57 h59.06 r90